# Altium PCB PCB5.PcbDoc
Units mil, origin at the board's own origin, x right, y up, seen from the top; angles counter-clockwise.
Board outline 3000 x 4000 mil, 2 copper layers (Top Layer, Bottom Layer); 32 components, 34 nets, 194 pads, 23 vias.
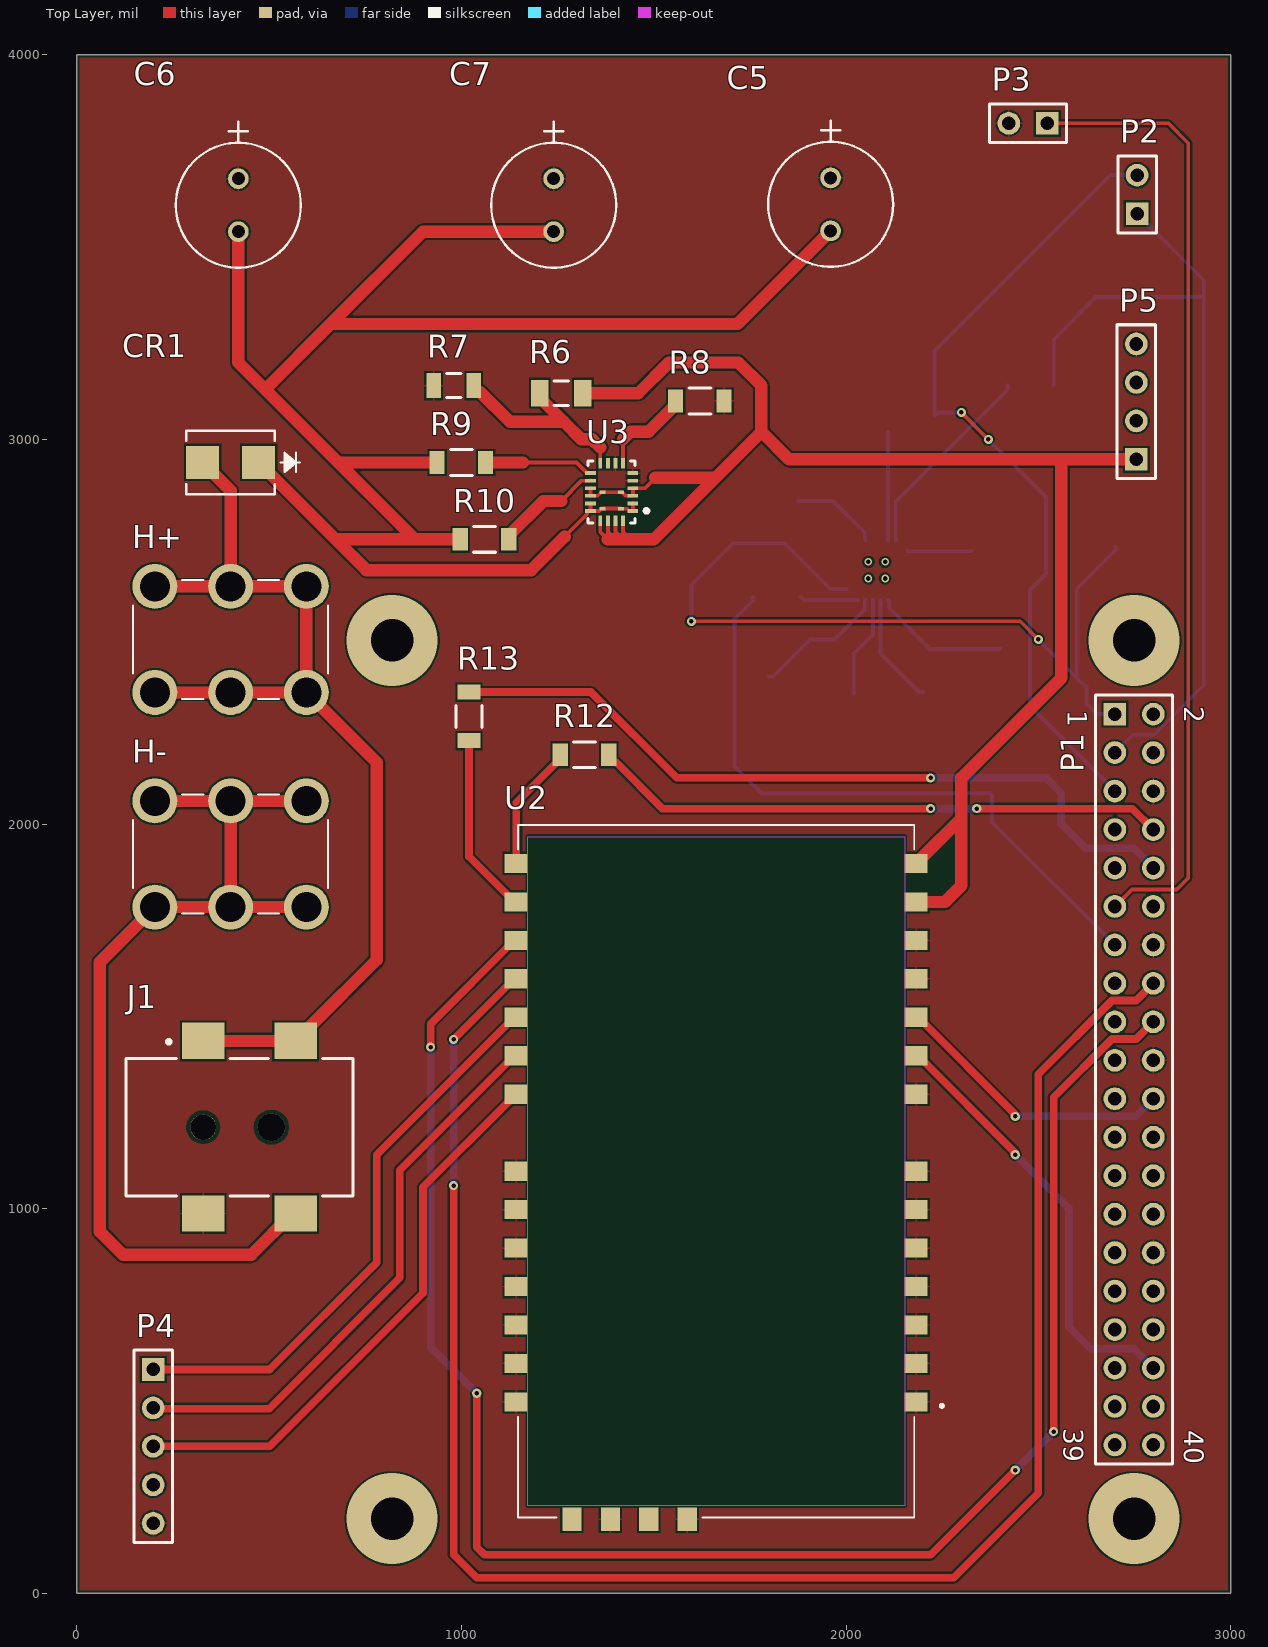
[diagram p0: Top Layer view]
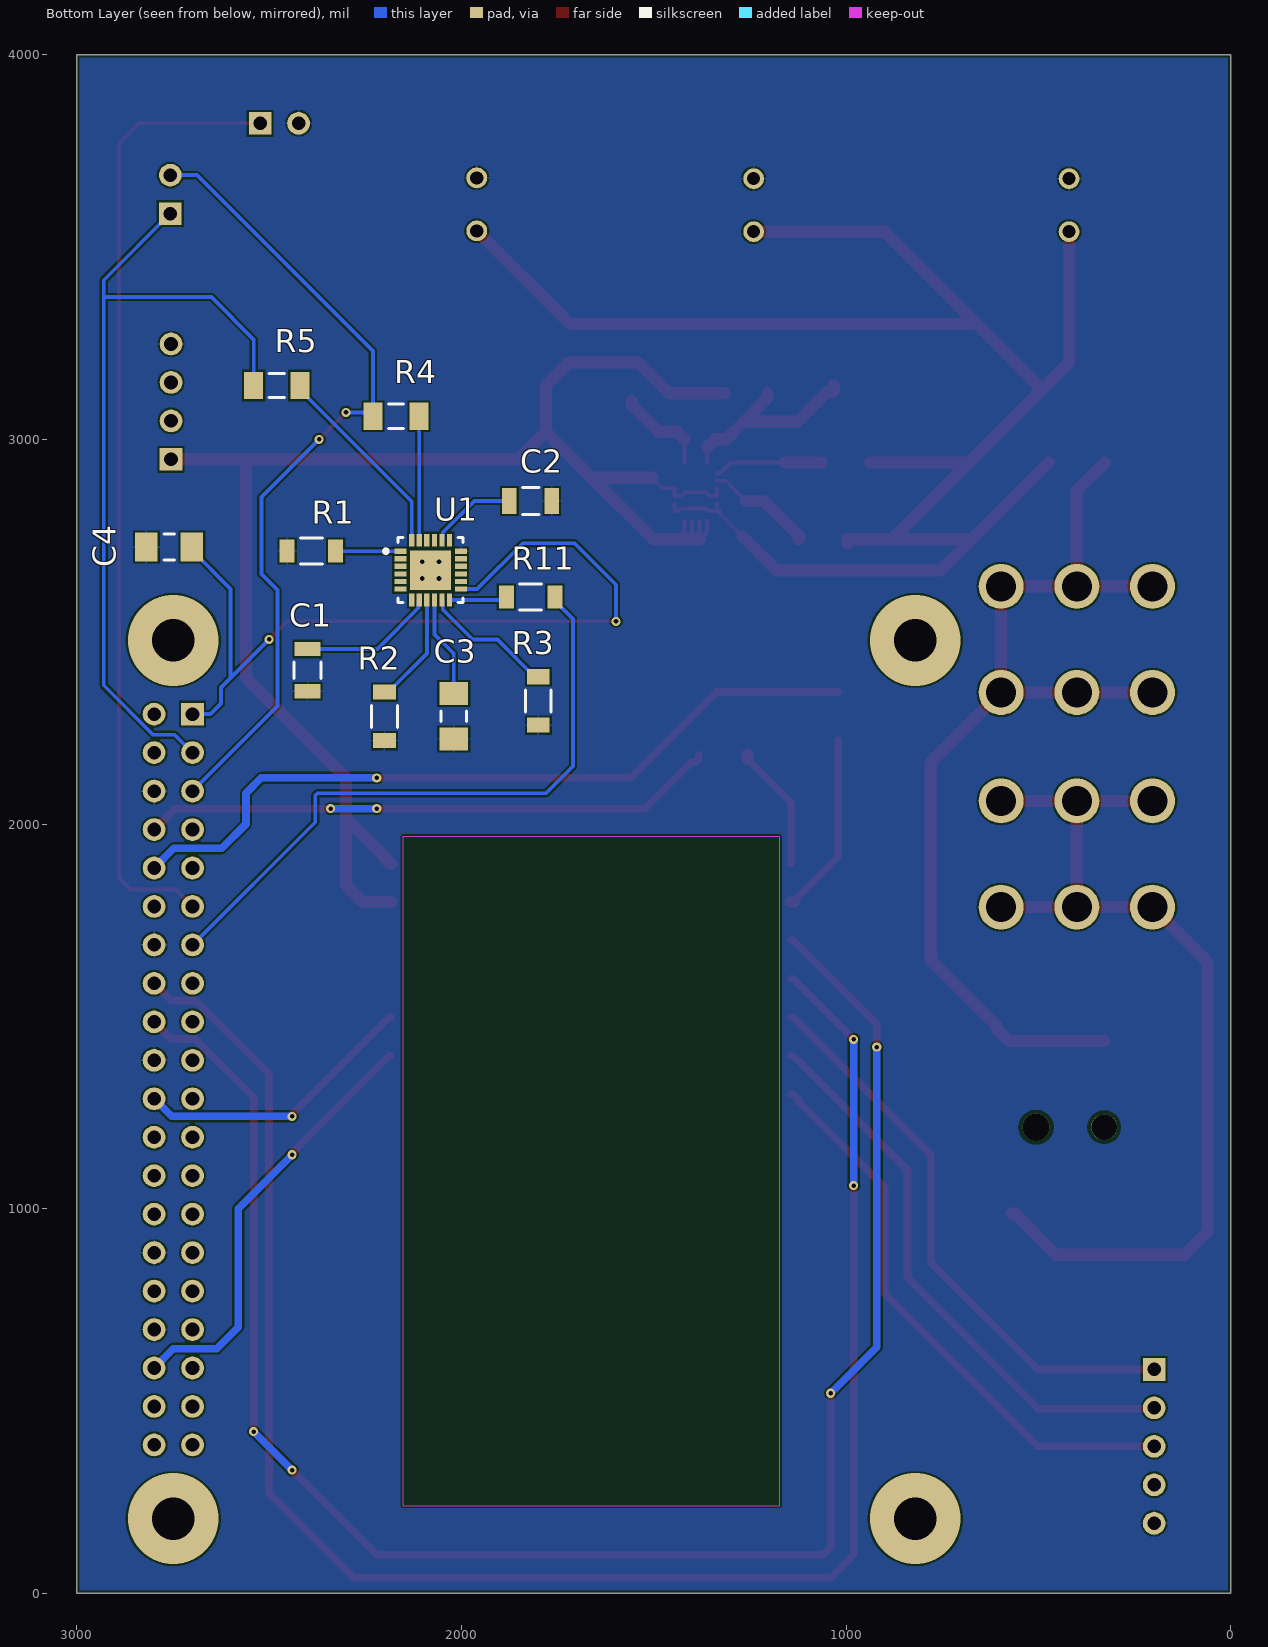
[diagram p1: Bottom Layer view, seen from below]
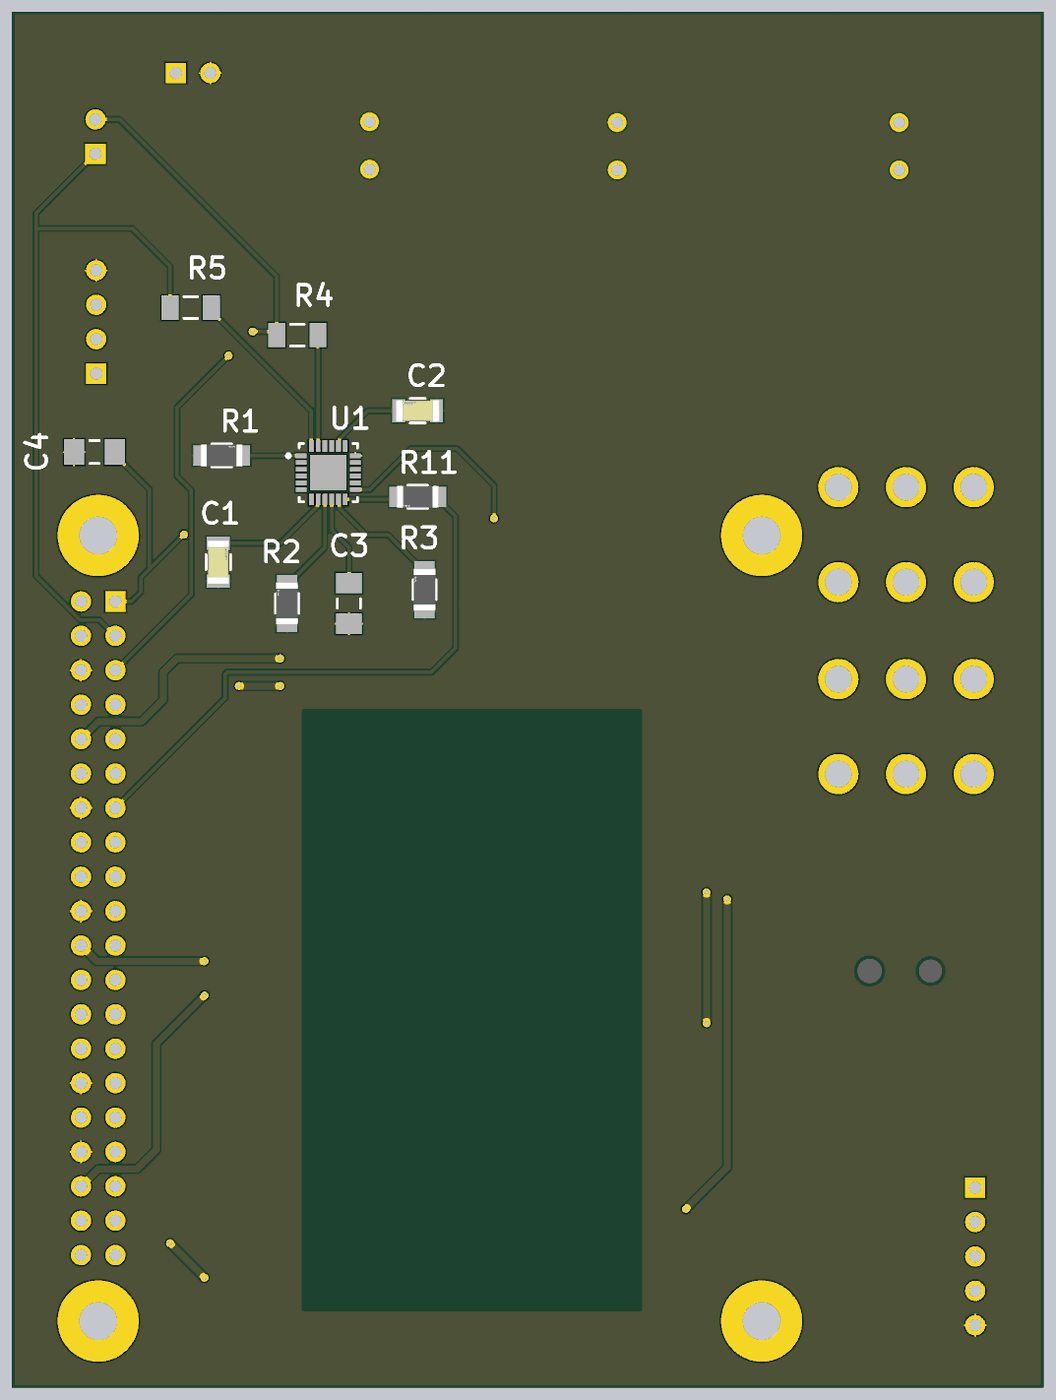
[diagram p2: 3D render of the assembled board from below, using the file's embedded part models]

## Layer stack, top to bottom
Top Solder: solder mask 0.4, Solder Resist, Dk 3.5
Top Layer: signal copper 1.4
Dielectric 1: dielectric 12.6, FR-4, Dk 4.8
Bottom Layer: signal copper 1.4
Bottom Solder: solder mask 0.4, Solder Resist, Dk 3.5

## Board outline
0,0 0,4000 3000,4000 3000,0

## Design rules (kind name [scope] priority, off if disabled: settings)
BoardOutlineClearance [All] p1: gap=7.87 ignorepadtopadclearanceinfootprint=FALSE
Clearance [All] p1: gap=5 ignorepadtopadclearanceinfootprint=FALSE except(9.84: Arc-Hole Track-Hole SMDPad-Hole THPad-Hole Via-Hole Fill-Hole Poly-Hole Region-Hole Text-Hole)
ComponentClearance [All] p1: gap=5 collisioncheckmode=3 verticalgap=5 showdistances=TRUE
DiffPairsRouting [All] p1: maxlimit=10 minlimit=5 mostfreqgap=5 toplayer_minwidth=5 toplayer_maxwidth=1000 toplayer_prefwidth=5 bottomlayer_minwidth=5 bottomlayer_maxwidth=1000 bottomlayer_prefwidth=5 maxuncoupledlength=500
Height [All] p1: minheight=0 maxheight=71497.94 prefheight=500
HoleSize [All] p1: absolutevalues=TRUE maxlimit=248.03 minlimit=11.81 maxpercent=80.000 minpercent=20.000
HoleToHoleClearance [All] p1: gap=9.84 allowstackedmicrovias=FALSE
MinimumAnnularRing [All] p1: minimumring=3
MinimumSolderMaskSliver [All] p1: minsoldermaskwidth=0
PlaneClearance [All] p1: clearance=5
PlaneConnect PlaneConnectPowerPads [InPadClass('PowerPads')] p1: planeconnectstyle=Direct reliefexpansion=20 reliefentries=4 reliefconductorwidth=10 reliefairgap=10
PlaneConnect [All] p2: pad.planeconnectstyle=Relief pad.reliefexpansion=11.81 pad.reliefentries=4 pad.reliefconductorwidth=5 pad.reliefairgap=5 via.planeconnectstyle=Direct via.reliefexpansion=11.81 via.reliefentries=4 via.reliefconductorwidth=5 via.reliefairgap=5
PolygonConnect PolygonConnectPowerPads [All vs (InPadClass('PowerPads'))] p1: connectstyle=Direct reliefconductorwidth=10 reliefentries=4 polygonreliefangle="90 Angle" airgapwidth=10
PolygonConnect [All] p2: thpad.connectstyle=Relief thpad.reliefconductorwidth=5 thpad.reliefentries=4 thpad.polygonreliefangle="90 Angle" thpad.airgapwidth=5 smdpad.connectstyle=Relief smdpad.reliefconductorwidth=5 smdpad.reliefentries=4 smdpad.polygonreliefangle="90 Angle" smdpad.airgapwidth=5 via.connectstyle=Direct via.reliefconductorwidth=5 via.reliefentries=4 via.polygonreliefangle="90 Angle" via.airgapwidth=5
RoutingVias [All] p1: holewidth=11.81 width=23.62 viastyle="Through Hole" minholewidth=11.81 minwidth=23.62 maxholewidth=23.62 maxwidth=259.84
SilkToSilkClearance [All] p1: silktosilkclearance=0
SilkToSolderMaskClearance [IsPad] p1: minsilkscreentomaskgap=5 clearancetoexposedcopper=TRUE
SolderMaskExpansion [All] p1: expansion=2.95 istentingtop=FALSE
Width [All] p1: maxlimit=1000 minlimit=10 preferedwidth=10 minimp=50.000000 maximp=50.000000 favimp=50.000000
20 further rules are at their usual default settings.

## Classes and differential pairs
differential pair M6EUSBData: +M6EUSBData_P -M6EUSBData_N

## Components (designator, comment, footprint, x,y, rotation, side; value= is the part's Value field where it differs from the comment)
C1 "C1206C103K1RACTU" FP-C1206C-EB-MFG 2400,2400 r270 bottom value="10,000 pF"
C2 "C1206C222K5RACTU" FP-C1206C-EB-MFG 1820,2840 r180 bottom value="2,200 pF"
C3 "C1206C104K5RACTU" KEMT-1206-2_M 2020,2280 r90 bottom
C4 "C1206C104K5RACTU" KEMT-1206-2_M 2760,2720 r180 bottom
C5 "UPJ1J560MPD1TD" CAP_UPJ_8X15_NCH 1960,3680 r270 top
C6 "UPJ1J560MPD1TD" CAP_UPJ_8X15_NCH 420,3677.8 r270 top
C7 "UPJ1J560MPD1TD" CAP_UPJ_8X15_NCH 1240,3677.8 r270 top
CR1 "SS2H10-E3/52T" DIODE_DO214AA 400,2940 r180 top
H+ "8197" KEYSTONE_8197 400,2480 r180 top
H- "8197" KEYSTONE_8197 400,1922.01 r180 top
J1 "PJ-002BH-SMT-TR" FP-PJ-002BH-SMT-TR-MFG 423.23,1211.61 r0 top
P1 "Header 20X2" HDR2X20 2699.02,2285.63 r270 top
P2 "Header 2" HDR1X2 2756.89,3587.01 r90 top
P3 "Header 2" HDR1X2 2523.23,3821.85 r180 top
P4 "Header 5" HDR1X5 198.82,581.89 r270 top
P5 "Header 4" HDR1X4 2754.92,2948.03 r90 top
R1 "RC1206JR-070RL" FP-RC1206-MFG 2390,2710 r180 bottom value=0Ω
R2 "RC1206JR-070RL" FP-RC1206-MFG 2200,2280 r90 bottom value=0Ω
R3 "RC1206JR-070RL" FP-RC1206-MFG 1800,2320 r90 bottom value=0Ω
R4 "RC1206FR-0710KL" RESC3116X65X40ML10T20 2170,3060 r180 bottom
R5 "RC1206FR-0710KL" RESC3116X65X40ML10T20 2480,3140 r180 bottom
R6 "CRCW120695K3FKEA" FP-CRCW1206-e3-IPC_B 1260,3120 r0 top
R7 "CRCW12063K92FKEA" FP-CRCW1206-e3-IPC_C 980,3140 r0 top
R8 "RC1206JR-070RL" FP-RC1206-MFG 1620,3100 r180 top value=0Ω
R9 "AC1206FR-07100KL" FP-AC1206-MFG 1000,2940 r180 top value=100KΩ
R10 "RC1206JR-070RL" FP-RC1206-MFG 1060,2740 r180 top value=0Ω
R11 "RC1206JR-070RL" FP-RC1206-MFG 1820,2590 r0 bottom value=0Ω
R12 "RC1206JR-070RL" FP-RC1206-MFG 1320,2180 r0 top value=0Ω
R13 "RC1206JR-070RL" FP-RC1206-MFG 1020,2280 r90 top value=0Ω
U1 "MPU-6050" IS-QFN-24_V 2080,2660 r180 bottom
U2 "M6E-MICRO" XCVR_M6E-MICRO 1662.4,1097.44 r180 top
U3 "LT3033IUDC#PBF" FP-UDC-20-05-08-1536-MFG 1390.75,2863.19 r180 top

## Footprints (in the part's own frame and the unit in brackets; to place one, negate y for a bottom-side part, rotate by r counter-clockwise, add the part's x,y. Pads: shape width x height; smd on the part's side, far side on the other; paste and mask are expansions set on the pad)
CAP_UPJ_8X15_NCH [mil]
  round 54 hole 34 mask+0: 1(0,0) 2(137.8,0)
  silkscreen extent -149,-162 231,162, body extent 0,0 10,10, height 10
DIODE_DO214AA [mil]
  rect 86x86 smd: 1(-73,0) 2(73,0)
  silkscreen extent -180,-83 115,83, body extent 0,0 10,10, height 10
FP-AC1206-MFG [mm]
  rect 1x1.5 smd paste+0 mask+0: 1(-1.6,0) 2(1.6,0)
  silkscreen extent -0.72,-0.85 0.72,0.85, body extent -2.2,-0.95 2.2,0.95, height 0.25
FP-C1206C-EB-MFG [mm]
  rect 0.95x1.7 smd paste+0 mask+0: 1(-1.4,0) 2(1.4,0)
  silkscreen extent -0.55,-0.9 0.55,0.9, body extent -1.6,-0.8 1.6,0.8, height 0.88
FP-CRCW1206-e3-IPC_B [mil]
  rect 45.51x69.22 smd paste+0 mask+0: 1(-56.14,0) 2(56.14,0)
  silkscreen extent -19,-31 19,31, body extent -89,-44 89,44, height 10
FP-CRCW1206-e3-IPC_C [mil]
  rect 37.64x65.28 smd paste+0 mask+0: 1(-52.21,0) 2(52.21,0)
  silkscreen extent -19,-31 19,31, body extent -75,-38 75,38, height 10
FP-PJ-002BH-SMT-TR-MFG [mm]
  rect 2.8x2.4 smd paste+0 mask+0: 1(-2.4,5.7) 1(3.7,5.7) 2(-2.4,-5.7) 3(3.7,-5.7)
  round 1.7 hole 1.7 unplated paste-1000 mask+0: ""(-2.4,0)
  round 1.8 hole 1.8 unplated paste-1000 mask+0: ""(2.1,0)
  silkscreen extent -7.5,-4.55 7.5,5.77, body extent -7.6,-7 7.6,7, height 0.25
FP-RC1206-MFG [mm]
  rect 1x1.5 smd paste+0 mask+0: 1(-1.6,0) 2(1.6,0)
  silkscreen extent -0.72,-0.85 0.72,0.85, body extent -1.55,-0.8 1.55,0.8, height 0.65
FP-UDC-20-05-08-1536-MFG [mm]
  rect 0.7x0.25 smd paste+0 mask+0: 1(-1.4,1.25) 2(-1.4,0.75) 3(-1.4,0.25) 4(-1.4,-0.25) 5(-1.4,-0.75) 6(-1.4,-1.25) 11(1.4,-1.25) 12(1.4,-0.75) 13(1.4,-0.25) 14(1.4,0.25) 15(1.4,0.75) 16(1.4,1.25)
  rect 0.25x0.7 smd paste+0 mask+0: 7(-0.75,-1.9) 8(-0.25,-1.9) 9(0.25,-1.9) 10(0.75,-1.9) 17(0.75,1.9) 18(0.25,1.9) 19(-0.25,1.9) 20(-0.75,1.9)
  rect 0.41x0.25 smd paste+0 mask+0: 21(-0.613,1.1) 22(0.612,1.1) 23(-0.613,0.019) 24(0.612,0.019)
  silkscreen extent -2.43,-2.05 1.55,2.05, body extent -1.85,-2.35 1.85,2.35, height 0.25
HDR1X2 [mm] "Connector; Header; 2 Position"
  rect 1.5x1.5 hole 0.9: 1(0,0)
  round 1.5 hole 0.9: 2(2.54,0)
  silkscreen extent -1.27,-1.27 3.81,1.27
HDR1X4 [mm] "Connector; Header; 4 Position"
  rect 1.5x1.5 hole 0.9: 1(0,0)
  round 1.5 hole 0.9: 2(2.54,0) 3(5.08,0) 4(7.62,0)
  silkscreen extent -1.27,-1.27 8.89,1.27
HDR1X5 [mm] "Connector; Header; 5 Position"
  rect 1.5x1.5 hole 0.9: 1(0,0)
  round 1.5 hole 0.9: 2(2.54,0) 3(5.08,0) 4(7.62,0) 5(10.16,0)
  silkscreen extent -1.27,-1.27 11.43,1.27
HDR2X20 [mm] "Connector; Header; 20x2 Position"
  rect 1.5x1.5 hole 0.9: 1(0,0)
  round 1.5 hole 0.9: 2(0,2.54) 3(2.54,0) 4(2.54,2.54) 5(5.08,0) 6(5.08,2.54) 7(7.62,0) 8(7.62,2.54) 9(10.16,0) 10(10.16,2.54) 11(12.7,0) 12(12.7,2.54) 13(15.24,0) 14(15.24,2.54) 15(17.78,0) 16(17.78,2.54) 17(20.32,0) 18(20.32,2.54) 19(22.86,0) 20(22.86,2.54) 21(25.4,0) 22(25.4,2.54) 23(27.94,0) 24(27.94,2.54) 25(30.48,0) 26(30.48,2.54) 27(33.02,0) 28(33.02,2.54) 29(35.56,0) 30(35.56,2.54) 31(38.1,0) 32(38.1,2.54) 33(40.64,0) 34(40.64,2.54) 35(43.18,0) 36(43.18,2.54) 37(45.72,0) 38(45.72,2.54) 39(48.26,0) 40(48.26,2.54)
  silkscreen extent -1.27,-1.27 49.53,3.81
IS-QFN-24_V [mm] "QFN, 24-Leads, Body 4x4mm, Pitch 0.5mm, Thermal Pad 2.7x2.6mm"
  rect 0.8x0.35 smd: 1(-2,1.25) 2(-2,0.75) 3(-2,0.25) 4(-2,-0.25) 5(-2,-0.75) 6(-2,-1.25) 13(2,-1.25) 14(2,-0.75) 15(2,-0.25) 16(2,0.25) 17(2,0.75) 18(2,1.25)
  rect 0.35x0.85 smd mask+0.102: 7(-1.25,-1.975) 8(-0.75,-1.975) 9(-0.25,-1.975) 10(0.25,-1.975) 11(0.75,-1.975) 12(1.25,-1.975) 19(1.25,1.975) 20(0.75,1.975) 21(0.25,1.975) 22(-0.25,1.975) 23(-0.75,1.975) 24(-1.25,1.975)
  rect 2.7x2.6 smd: 25(0,0)
  silkscreen extent -3.08,-2.15 2.15,2.15, body extent -2,-2 2,2, height 0.95
KEMT-1206-2_M [mm] "SMD, 2-Leads, Body 3.4x1.8mm, IPC Low Density"
  rect 1.5x1.9 smd: 1(-1.5,0) 2(1.5,0)
  silkscreen extent -0.35,-0.85 0.35,0.85, body extent -1.7,-0.9 1.7,0.9, height 0.88
KEYSTONE_8197 [mm]
  round 2.97 hole 1.98: 1(-5,-3.505) 2(-5,3.505) 3(0,-3.505) 4(0,3.505) 5(5,-3.505) 6(5,3.505)
  silkscreen extent -6.44,-3.94 6.44,3.94
RESC3116X65X40ML10T20 [mm] "Chip Resistor, 2-Leads, Body 3.10x1.60mm, IPC Low Density"
  rect 1.25x1.8 smd: 1(-1.525,0) 2(1.525,0)
  silkscreen extent -0.5,-0.8 0.5,0.8, body extent -1.6,-0.85 1.6,0.85, height 0.65
XCVR_M6E-MICRO [mil]
  rect 60x50 smd: 1(-520,600) 2(520,600) 3(-520,500) 4(520,500) 5(-520,400) 6(520,400) 7(-520,300) 8(520,300) 9(-520,200) 10(520,200) 11(-520,100) 12(520,100) 13(-520,0) 14(520,0) 15(-520,-200) 16(520,-200) 17(-520,-300) 18(520,-300) 19(-520,-400) 20(520,-400) 21(-520,-500) 22(520,-500) 23(-520,-600) 24(520,-600) 25(-520,-700) 26(520,-700) 27(-520,-800) 28(520,-800)
  rect 50x60 smd: 29(75,905) 30(175,905) 31(275,905) 32(375,905)
  Keep-Out Layer region: 490,-870 -490,-870 -490,870 490,870
  Keep-Out Layer region: 490,-870 -490,-870 -490,870 490,870
  silkscreen extent -591,-900 515,900

## Part data
C1: library part CMP-03020-021723-1, "Cap Ceramic 0.01uF 100V X7R 10% SMD 1206 125°C Plastic T/R", Capacitance="10,000 pF", Manufacturer=KEMET, Package=C1206C-EB, Temperature="-55°C to +150°C", Temperature Characteristic=X7R, Temperature Coefficient=15%, Temperature Range High=+150°C, Temperature Range Low=-55°C, Tolerance=0.1, Voltage Rating="100 V", Automotive=Yes, Automotive Grade="Grade 0", Category=Cap, ComponentLink2Description=Datasheet, ComponentLink2URL=https://content.kemet.com/datasheets/KEM_C1007_X8R_ULTRA_150C_SMD.pdf, Device Class L1="Passive Components", Device Class L2=Capacitors, Device Class L3="Ceramic Capacitors", Digikey Description="Cap Ceramic 0.01uF 100V X7R 10% SMD 1206 125°C Plastic T/R", Height=0.88mm, Ipc Land Pattern Name=CAPC320160X78, Lead Free=Yes, Manufacturer Part Number=C1206C103K1RACTU, Material=Ceramic, Mouser Description="Multilayer Ceramic Capacitors MLCC - SMD/SMT 100volts 10000pF X7R 10%", Octopart=https://octopart.com/c1206c103k1ractu-kemet-117927, RoHS=TRUE
C2: library part CMP-03020-006263-1, "CAP CER 2200PF 50V X7R 1206", Capacitance="2,200 pF", Manufacturer=KEMET, Package=C1206C-EB, Temperature="-55°C to +150°C", Temperature Characteristic=X7R, Temperature Coefficient=15%, Temperature Range High=+150°C, Temperature Range Low=-55°C, Tolerance=0.1, Voltage Rating="50 V", Automotive=Yes, Automotive Grade="Grade 0", Category=Cap, ComponentLink2Description=Datasheet, ComponentLink2URL=https://content.kemet.com/datasheets/KEM_C1007_X8R_ULTRA_150C_SMD.pdf, Device Class L1="Passive Components", Device Class L2=Capacitors, Device Class L3="Ceramic Capacitors", Digikey Description="CAP CER 2200PF 50V X7R 1206", Height=0.88mm, Ipc Land Pattern Name=CAPC320160X78, Lead Free=Yes, Manufacturer Part Number=C1206C222K5RACTU, Material=Ceramic, Mouser Description="Multilayer Ceramic Capacitors MLCC - SMD/SMT 50volts 2200pF X7R 10%", Octopart=https://octopart.com/c1206c222k5ractu-kemet-135692, RoHS=TRUE
C3 C4: library part CMP-1037-04202-2, "CAP, Ceramic, 0.1 uF, +/- 10%, 50 V, -55 to 125 degC, 1206 (3216 Metric), RoHS, Tape and Reel", Capacitance=0.1µF, Capacitance Tolerance=±10%, Capacitor Case Style=1206[3216Metric], Dielectric Characteristic=X7R, Manufacturer=Kemet, Operating Temperature Max=125degC, Operating Temperature Min=-55degC, Package Description="2-Leads SMD, Body 3.2 x 1.6 mm", Package Reference=1206-2, Voltage Rating=50V, Datasheet URL=https://datasheet.ciiva.com/6125/1725438-6125494.pdf, Datasheet Version=Jul-13, Manufacturer URL=http://www.kemet.com/, Packaging=Tape&Reel, Product Range=KEMET-CSeries, SVHC=ToBeAdvised
C5 C6 C7 CR1: "No Description Available", Copyright="Copyright (C) 2018 Accelerated Designs. All rights reserved", RefDes=RefDes, Type=DEV
  C5 C6 C7: Built_By=EMA_Cory, Manufacturer_Part_Number=UPJ1J560MPD1TD, SourceLibrary=Nichicon_2019-09-13, Vendor=Nichicon
  CR1: Built_By=EMA_UL_Team, Manufacturer_Part_Number=SS2H10-E3/52T, Vendor=Vishay
H+ H-: "Magnet Neodymium Iron Boron _NdFeB_ 0.500 Dia x 0.750 H _12.7mm x 19.0mm_", Package=None, Availability=Unavailable, MF="Radial Magnet", MP=8197, Price=None, SnapEDA_Link=https://www.snapeda.com/parts/8197/Keystone%20Electronics/view-part/474380/?ref=snap
J1: library part CMP-2000-06897-2, "CONN PWR JACK 2.5X5.5MM SOLDER", Current Rating=5A, Manufacturer="CUI Inc", Package=0, Temperature="-25°C to +85°C", Temperature Range High=+85°C, Temperature Range Low=-25°C, Voltage Rating=24V, Automotive=No, Category=Conn, ComponentLink2Description=Datasheet, ComponentLink2URL=https://www.cuidevices.com/product/resource/digikeypdf/pj-002bh-smt-tr.pdf, Conn Gender=Male, Conn Orientation="Right Angle", Contact Material=Nickel,Silver, Device Class L1=Connectors, Device Class L2="Power Connectors", Device Class L3=unset, Digikey Description="CONN PWR JACK 2.5X5.5MM SOLDER", Height=11.43mm, Lead Free=Yes, Manufacturer Part Number=PJ-002BH-SMT-TR, Mouser Description="2.5 mm Center Pin, 5.0 A, Right Angle, Surface Mount (SMT), Dc Power Jack Connector", Number Of Contacts=3, Octopart=https://octopart.com/pj-002bh-smt-tr-cui-25947151, RoHS=TRUE, Standoff Height=0.1mm
P1: "Header, 20-Pin, Dual row", LatestRevisionDate=17-Jul-2002, LatestRevisionNote="Re-released for DXP Platform.", Publisher="Altium Limited"
P2 P3: "Header, 2-Pin", LatestRevisionDate=17-Jul-2002, LatestRevisionNote="Re-released for DXP Platform.", Publisher="Altium Limited"
P4: "Header, 5-Pin", LatestRevisionDate=17-Jul-2002, LatestRevisionNote="Re-released for DXP Platform.", Publisher="Altium Limited"
P5: "Header, 4-Pin", LatestRevisionDate=17-Jul-2002, LatestRevisionNote="Re-released for DXP Platform.", Publisher="Altium Limited"
R1 R2 R3 R8 R10 R11 R12 R13: library part CMP-2100-03681-2, "RES SMD 0 OHM JUMPER 1/4W 1206", Manufacturer=YAGEO, Package=RC1206, Power Rating=0.25W, Resistance=0Ω, Temperature="-55°C to +155°C", Temperature Coefficient=300ppm/°C, Temperature Range High=+155°C, Temperature Range Low=-55°C, Tolerance=5%, Voltage Rating=200V, Automotive=No, Category=Res, ComponentLink2Description=Datasheet, ComponentLink2URL=https://www.yageo.com/upload/media/product/productsearch/datasheet/rchip/PYu-RC_Group_51_RoHS_L_10.pdf, Composition="Thick Film", Device Class L1="Passive Components", Device Class L2=Resistors, Device Class L3="Chip SMD Resistors", Digikey Description="RES SMD 0 OHM JUMPER 1/4W 1206", Footprint Url=https://www.yageo.com/upload/website/yageo_PYu-R_Mount_10_19050818_343.pdf, Height=0.65mm, Ipc Land Pattern Name=RESC310160X55, Lead Free=Yes, Manufacturer Part Number=RC1206JR-070RL, Mouser Description="Resistor: thick film; SMD; 1206; 0O; 0.25W; ±5%; -55÷155°C", Octopart=https://octopart.com/rc1206jr-070rl-yageo-40025601, RoHS=TRUE, Series=RC
R4 R5: library part CMP-1014-00623-2, "Chip Resistor, 10 KOhm, +/- 1%, 0.25 W, -55 to 155 degC, 1206 (3216 Metric), RoHS, Tape and Reel", Case Code (Imperial)=1206, Case Code (Metric)=3216, Manufacturer=Yageo, Max Operating Temperature=155degC, Min Operating Temperature=-55degC, Package Description="2-Pin Surface Mount Device, Body 3.1 x 1.6 mm", Package Quantity=5000, Package Reference=1206.0, Power Rating=250mW, Resistance=10KΩ, Temperature Coefficient=100ppm/degreesC, Tolerance=1%, Voltage Rating=200V, Case/Package=1206, Composition=ThickFilm, Datasheet URL=http://www.yageo.com/NewPortal/yageodocoutput?fileName=/pdf/R-Chip/PYu-RC_Group_51_RoHS_L_5.pdf, Datasheet Version="Rev. 5, 10/2016", Depth=1.6mm, Height=0.55mm, Lead Free=LeadFree, Length=3.1mm, Manufacturer URL=http://www.yageo.com/, Military Standard=Not, Packaging=TapeandReel, REACH SVHC=Unknown, RoHSCompliant=true, Termination=SMD/SMT, Width=1.6mm
R6: library part CMP-02407-004492-1, "RES Thick Film, 95.3kΩ, 1%, 0.25W, 100ppm/°C, 1206", Case Code (Imperial)=1206, Case Code (Metric)=3216, Max Operating Temperature=155°C, Max Power Dissipation=250mW, Min Operating Temperature=-55°C, Package Quantity=10, Resistance=95.3kΩ, Temperature Coefficient=100ppm/°C, Tolerance=1%, Voltage Rating=200V, Case/Package=1206, Composition="Thick Film", Contact Plating=Tin, Depth=1.6mm, Features="Automotive AEC-Q200", Height=0.024inch, Lead Free="Lead Free", Length=3.2mm, Military Standard=Not, Number of Pins=2, Number of Terminations=2, Packaging="Tape and Reel", Power Rating=250mW, Radiation Hardening=No, Voltage Rating (DC)=200V, Weight=0.000353oz, Width=0.063inch
R7: library part CMP-2003-02162-2, "RES Thick Film, 3.92kΩ, 1%, 0.25W, 100ppm/°C, 1206", Case Code (Imperial)=1206, Case Code (Metric)=3216, Max Operating Temperature=155°C, Max Power Dissipation=250mW, Min Operating Temperature=-55°C, Package Quantity=10, Resistance=3.92kΩ, Temperature Coefficient=100ppm/°C, Tolerance=1%, Voltage Rating=200V, Case/Package=1206, Composition="Thick Film", Contact Plating=Tin, Depth=1.6mm, Features="Automotive AEC-Q200", Height=0.55mm, Lead Free="Lead Free", Length=3.2mm, Military Standard=Not, Number of Pins=2, Number of Terminations=2, Packaging="Tape and Reel", Power Rating=250mW, Radiation Hardening=No, Termination=SMD/SMT, Voltage Rating (DC)=200V, Weight=0.000353oz, Width=1.6mm
R9: library part CMP-2003-04909-2, "RES SMD 100K OHM 1% 1/4W 1206", Manufacturer=Yageo, Package=AC1206, Power Rating=0.25W, Resistance=100KΩ, Temperature="-55°C to +155°C", Temperature Range High=+155°C, Temperature Range Low=-55°C, Tolerance=0.01, Voltage Rating=200V, Automotive=Yes, Automotive Grade="Grade 0", Category=Res, ComponentLink2Description=Datasheet, ComponentLink2URL=http://www.yageo.com/NewPortal/yageodocoutput?fileName=/pdf/R-Chip/PYu-AC_51_RoHS_L_6.pdf, Composition="Thick Film", Device Class L1="Passive Components", Device Class L2=Resistors, Device Class L3="Chip SMD Resistors", Digikey Description="RES SMD 100K OHM 1% 1/4W 1206", Footprint Url=http://www.yageo.com/exep/pages/download/literatures/PYu-R_Mount_10.pdf, Height=0.65mm, Ipc Land Pattern Name=RESC310160X55, Lead Free=Yes, Manufacturer Part Number=AC1206FR-07100KL, Mouser Description="RES SMD 100K OHM 1% 1/4W 1206", Octopart=https://octopart.com/ac1206fr-07100kl-yageo-21711116, RoHS=TRUE, Series=AC
U1: library part CMP-1753-00002-2, "3-Axis Gyroscope, Accelerometer and a Digital Motion Processor(TM) (DMP), 2.375 to 3.46 V, -40 to 85 degC, 24-Pin QFN, RoHS, Tape and Reel", Manufacturer=InvenSense, Standard Package=5,000, Category=Sensors,Transducers, Datasheet URL=http://datasheet.octopart.com/MPU-6050-InvenSense-datasheet-14421344.pdf, Datasheet Version="Rev. 3.3, 05/2012", Dynamic Catalog=MPU-6000™Series, Family=Multifunction, Featured Product=MPU-60506-Axis,IntegratedI²CSolution, Manufacturer URL=http://www.invensense.com/, Online Catalog=MPU-6000™Series, Other Names="1428-1007-2 / MPU6050", Output Type=Digital, Sensor Type=MotionTracking, Unit PriceUSD=Digital
U2: "KIT DEVELOPMENT M6E MICRO-LTE", Package="Module Thingmagic", Availability=Warning, Check_prices=https://www.snapeda.com/parts/M6E-MICRO/ThingMagic,%20a%20JADAK%20brand/view-part/791113/?ref=eda, DigiKey-Purchase-URL=https://snapeda.com/shop?store=DigiKey&id=791113, MF="ThingMagic, a", MP=M6E-MICRO, Price=None, SnapEDA_Link=https://www.snapeda.com/parts/M6E-MICRO/ThingMagic,%20a%20JADAK%20brand/view-part/791113/?ref=snap
U3: library part CMP-09138-000006-1, "IC REG LINEAR POS ADJ 3A 20QFN", Dropout Voltage=95mV, Manufacturer="Analog Devices", Max Junction Temp=+125°C, Max Supply Voltage=10V, Min Supply Voltage=0.95V, Nominal Supply Current=1.9-27mA, Output Current=3A, Output Voltage=0.2-9.7V, Package=UDC-20-05-08-1536, Temperature="-40°C to +125°C", Temperature Range Low=-40°C, Automotive=No, Category=IC, ComponentLink2Description=Datasheet, ComponentLink2URL=https://www.analog.com/media/en/technical-documentation/data-sheets/LT3033.pdf, Device Class L1="Integrated Circuits (ICs)", Device Class L2="Power Management ICs", Device Class L3="Voltage Regulators - Linear", Digikey Description="IC REG LINEAR POS ADJ 3A 20QFN", Height=0.8mm, Lead Free=Yes, Manufacturer Part Number=LT3033IUDC#PBF, Number Of Outputs=1, Octopart=https://octopart.com/lt3033iudc%23pbf-analog+devices-95403585, Output Type=AdjustableProgrammable, RoHS=TRUE, Standoff Height=0mm, Temperature Range High=+125°C

## Via types
v1: diameter 23.62, hole 11.81, Top Layer to Bottom Layer, 15 vias
v2: diameter 236.22, hole 110.24, Top Layer to Bottom Layer, 4 vias
v3: diameter 19.68, hole 12, Top Layer to Bottom Layer, 4 vias

## Nets (pads, with @x,y where several pads share a name; then routed paths per layer and width w, separated by ;. In a path a pad name is that pad's centre, name@x,y a point inside that pad or via, vN(x,y) a via of type N, cw(c..) or ccw(c..) an arc to the next point about the centre after c; other vN are vias at no path point)
"3V3 From Pi": C4.2 P1.1 U1.13 | length 2199.9
  Top Layer w10: v1(1598,2527) 2453,2527 v1(2500,2480)
  Bottom Layer w10: v1(1598,2527) 1598,2622.14 1705.86,2730 1840,2730 1959.21,2610.79 U1.13 ; v1(2500,2480) 2600,2380 ; P1.1 2652.37,2285.63 2625,2313 2625,2355 2600,2380 ; C4.2 2700.94,2712.13 2600,2611.18 2600,2380
"5v Vin (3.5-5.25VDC)": P5.1 R6.2 U2.25 U2.27 U3.3 U3.4 U3.13 U3.14 U3.17 U3.18 U3.19 U3.20 U3.23 U3.24 | length 4290.6
  Top Layer w10: U3.13 U3.14 1354.55,2853.35 1363.64,2862.44 U3.24 U3.23 1417.85,2862.44 1426.95,2853.35 U3.3 U3.4 1477.03,2873.03 1504,2900 ; U3.17 1361.22,2758.78 1380,2740 ; U3.18 1380.91,2759.09 1400,2740 ; U3.19 1400.59,2759.41 1420,2740 ; U3.20 1420.28,2759.72 1440,2740
  Top Layer w32: R6.2 1460,3120 1540,3200 1720,3200 1780,3140 1780,3020 ; 1380,2740 1400,2740 1420,2740 1440,2740 1500,2740 1660,2900 ; 1504,2900 1660,2900 ; U2.25 2257.44,1797.44 2300,1840 2300,2015.04 ; U2.27 2187.4,1897.44 2196.4,1906.44 2196.4,1911.44 2300,2015.04 ; P5.1 2560,2948.03 ; 1660,2900 1780,3020 ; 1780,3020 1851.97,2948.03 2560,2948.03 ; 2300,2015.04 2300,2120 2560,2380 2560,2948.03
GND: C1.2 C2.2 C3.1 C4.1 C5.1 C6.1 C7.1 J1.2 P1.6 P1.14 P1.20 P1.30 P1.34 P3.2 P4.5 P5.4 R1.1 R2.1 R3.1 R7.1 R8.1 U1.18 U2.1 U2.2 U2.3 U2.4 U2.5 U2.6 U2.7 U2.8 U2.9 U2.10 U2.11 U2.12 U2.13 U2.14 U2.15 U2.21 U2.23 U2.29 U2.31 U3.5 U3.6 U3.8
M6EUSBData_N: P4.2 U2.18 | length 1488.4
  Top Layer w20: P4.2 200.71,480 500,480 840,820 840,1100.04 1137.4,1397.44 U2.18
M6EUSBData_P: P4.3 U2.16 | length 1486.9
  Top Layer w20: P4.3 501.89,381.89 900,780 900,1055.04 1122.4,1277.44 1122.4,1282.44 1137.4,1297.44 U2.16
NetC1_1: C1.1 U1.8 | length 353.7
  Bottom Layer w10: U1.8 2111.42,2580.35 2111.42,2562.28 2218.57,2455.12 C1.1
NetC2_1: C2.1 U1.20 | length 228.3
  Bottom Layer w10: C2.1 1966.31,2840 2048.58,2757.73 2048.58,2739.65 U1.20
NetC3_2: C3.2 U1.10 | length 264
  Bottom Layer w10: C3.2 2020,2442.91 2070.16,2493.07 U1.10
NetC5_2: C5.2 C6.2 C7.2 CR1.1 R9.2 R10.2 U3.1 U3.2 U3.15 U3.16 U3.21 U3.22 | length 5101.5
  Top Layer w10: 1268.44,2746.79 1326.85,2805.2 1326.85,2813.9 1326.93,2813.98 U3.16 ; U3.15 U3.16 ; U3.2 U3.1 1437.17,2813.98 1431.34,2819.8 1414.94,2819.8 U3.21 U3.22 1363.64,2819.88 1357.81,2814.06 1335.71,2814.06 U3.16
  Top Layer w32: C6.2 420,3200 490,3130 ; CR1.1 676.5,2736.5 ; R9.2 680,2940 ; R10.2@997.01,2730.16 R10.2 880,2740 ; C7.2 900,3540 660,3300 ; 1268.44,2746.79 1181.65,2660 753,2660 676.5,2736.5 ; C5.2 1717.8,3300 660,3300 ; 490,3130 680,2940 ; 490,3130 660,3300 ; 676.5,2736.5 680,2740 880,2740 ; 680,2940 880,2740
NetCR1_2: CR1.2 H+.1 H+.2 H+.3 H+.4 H+.5 H+.6 J1.1 | length 2730.4
  Top Layer w32: H+.6 H+.4 H+.2 ; H+.5 H+.3 ; CR1.2 400,2867 H+.3 ; J1.1@328.74,1436.02 568.9,1436.02 576.77,1436.02 608.02,1467.27 608.02,1475.14 780,1647.13 780,2160 597.99,2342.01 H+.2 ; H+.3 H+.1 H+.2
NetH-_1: H-.1 H-.2 H-.3 H-.4 H-.5 H-.6 J1.3 | length 2544.9
  Top Layer w32: H-.5 H-.3 ; J1.3 561.02,987.2 453.82,880 120,880 60,940 60,1640.87 H-.6 H-.4 ; H-.2 H-.4 ; H-.1 H-.3 ; H-.4 H-.3
NetP1_3: P1.3 P2.1 R5.1 | length 2157.1
  Bottom Layer w10: R5.1 2540.04,3260.04 2650,3370 2930,3370 ; P1.3 2745.52,2232.14 2801.42,2232.14 2930,2360.71 2930,3370 ; P2.1 2930,3413.9 2930,3370
NetP1_5: P1.5 P2.2 R4.1 | length 2144.6
  Top Layer w10: v1(2300,3070) v1(2370,3000)
  Bottom Layer w10: v1(2300,3070) 2240.04,3070 R4.1 2230.04,3230.04 2687.01,3687.01 P2.2 ; v1(2370,3000) 2520,2850 2520,2650 2478.19,2608.19 2478.19,2306.46 P1.5
NetP1_8: P1.8 R12.2 | length 1502.3
  Top Layer w20: R12.2 1382.99,2170.16 1392.68,2160.47 1402.52,2160.47 1522.99,2040 v1(2220,2040) ; v1(2340,2040) 2744.65,2040 P1.8
  Bottom Layer w20: v1(2220,2040) v1(2340,2040)
NetP1_10: P1.10 R13.2 | length 2015.3
  Top Layer w20: R13.2 1337.01,2342.99 1560,2120 v1(2220,2120)
  Bottom Layer w20: v1(2220,2120) 2520,2120 2560,2080 2560,2000 2623,1937 2747.65,1937 P1.10
NetP1_11: P1.11 P3.1 | length 2520
  Top Layer w10: P3.1 2838.15,3821.85 2890,3770 2890,1860 2860,1830 2743.39,1830 P1.11
NetP1_13: P1.13 R11.1 | length 1681.5
  Bottom Layer w10: R11.1 1757.01,2580.16 1710,2533.15 1710,2150 1780,2080 2374.14,2080 2380,2074.14 2380,2004.65 P1.13
NetP1_16: P1.16 U2.22 | length 4690
  Top Layer w20: v1(980,1060) 980,100 1040,40 2280,40 2500,260 2500,1349.59 2691.52,1541.1 2754.49,1541.1 P1.16 ; v1(980,1440) 1137.4,1597.44 U2.22
  Bottom Layer w20: v1(980,1060) v1(980,1440)
NetP1_18: P1.18 U2.24 | length 4572.8
  Top Layer w20: v1(920,1420) 920,1480.04 1137.4,1697.44 U2.24 ; v1(1040,520) 1040,120 1060,100 2220,100 v1(2440,320) ; v1(2540,420) 2540,1289.59 2691.52,1441.1 2754.49,1441.1 P1.18
  Bottom Layer w20: v1(920,1420) 920,640 v1(1040,520) ; v1(2440,320) v1(2540,420)
NetP1_22: P1.22 U2.19 | length 745
  Top Layer w20: U2.19 2187.4,1497.44 2439.31,1245.54 2439.31,1240.69 v1(2440,1240)
  Bottom Layer w20: v1(2440,1240) 2753.39,1240 P1.22
NetP1_36: P1.36 U2.17 | length 1136.1
  Top Layer w20: U2.17 2187.4,1397.44 2439.31,1145.54 2439.31,1140.69 v1(2440,1140)
  Bottom Layer w20: v1(2440,1140) 2580,1000 2580,692 2636,636 2748.65,636 P1.36
NetP4_1: P4.1 U2.20 | length 1486.9
  Top Layer w20: P4.1 501.89,581.89 780,860 780,1140.04 1137.4,1497.44 U2.20
NetR1_2: R1.2 U1.1 | length 168.6
  Bottom Layer w10: U1.1 2326.22,2709.21 R1.2
NetR2_2: R2.2 U1.9 | length 290.6
  Bottom Layer w10: U1.9 2089.84,2443.31 2190.16,2342.99 R2.2
NetR3_2: R3.2 U1.11 | length 346.3
  Bottom Layer w10: R3.2 1809.84,2382.99 1906.37,2479.52 1970.37,2479.52 2048.58,2557.74 2048.58,2580.35 U1.11
NetR4_2: R4.2 U1.23 | length 282.4
  Bottom Layer w10: U1.23 2109.53,3019.57 2109.96,3020
NetR5_2: R5.2 U1.24 | length 522.7
  Bottom Layer w10: U1.24 2129.21,2838.43 2419.96,3129.17 R5.2
NetR6_1: R6.1 R7.2 U3.10 | length 544.4
  Top Layer w10: U3.10 1361.22,2978.78
  Top Layer w32: R7.2 1032.21,3126.18 1035.03,3123.36 1048.85,3123.36 1126.21,3046 1266,3046 ; R6.1 1203.85,3108.15 1266,3046 ; 1361.22,2978.78 1340,3000 1312,3000 1266,3046
NetR8_2: R8.2 U3.7 | length 246.1
  Top Layer w10: U3.7 1420.28,3000.28
  Top Layer w32: 1420.28,3000.28 1440,3020 1486.85,3020 1557.01,3090.16 R8.2
NetR9_1: R9.1 U3.11 | length 284.1
  Top Layer w10: 1160,2940 1299.33,2940 1326.93,2912.4 U3.11
  Top Layer w32: R9.1 1160,2940
NetR10_1: R10.1 U3.12 | length 281.7
  Top Layer w10: 1260,2840 1312.64,2892.64 1335.55,2892.64 U3.12
  Top Layer w32: R10.1 1122.99,2749.84 1213.15,2840 1260,2840
NetR11_2: R11.2 U1.12 | length 151
  Bottom Layer w10: R11.2 1890.75,2582.24 U1.12
NetR12_1: R12.1 U2.28 | length 330
  Top Layer w20: U2.28 1142.4,2055.55 R12.1@1257.01,2170.16
  Top Layer w32: R12.1@1257.01,2170.16 R12.1
NetR13_1: R13.1 U2.26 | length 473.2
  Top Layer w20: R13.1 1020,1914.84 U2.26@1137.4,1797.44
  Top Layer w32: U2.26@1137.4,1797.44 U2.26
pads on no net: J1. P1.2 P1.4 P1.7 P1.9 P1.12 P1.15 P1.17 P1.19 P1.21 P1.23 P1.24 P1.25 P1.26 P1.27 P1.28 P1.29 P1.31 P1.32 P1.33 P1.35 P1.37 P1.38 P1.39 P1.40 P4.4 P5.2 P5.3 U1.2 U1.3 U1.4 U1.5 U1.6 U1.7 U1.14 U1.15 U1.16 U1.17 U1.19 U1.21 U1.22 U1.25 U2.30 U2.32 U3.9
copper on no net:
  other v2: 819.88,193.9 2749.02,193.9 819.88,2477.36 2749.02,2477.36
  other v3: 2058.35,2638.35 2101.65,2638.35 2058.35,2681.65 2101.65,2681.65

## Polygon pours and split planes (outlines as drawn)
GND on Top Layer "GND_L01_P000" (solid, remove dead copper, pour order 0): 0,0 0,4000 3000,4000 3000,0
GND on Bottom Layer "GND_L02_P001" (solid, remove dead copper, pour order 1): 0,0 0,4000 3000,4000 3000,0

## Silkscreen, mask and mechanical layers (free items; w line width, h text height)
Mechanical 1:
  the board outline again, w10

## Text inside footprints (layer, text, board x,y; h text height)
C5: Mechanical 7 "0.315in/8.001mm" at 2187.5,3704.85 h25 r270; Mechanical 7 "0.138in/3.5mm" at 1707.5,3692.35 h25 r270
C6: Mechanical 7 "0.315in/8.001mm" at 647.5,3702.65 h25 r270; Mechanical 7 "0.138in/3.5mm" at 167.5,3690.15 h25 r270
C7: Mechanical 7 "0.315in/8.001mm" at 1467.5,3702.65 h25 r270; Mechanical 7 "0.138in/3.5mm" at 987.5,3690.15 h25 r270
P1: Top Overlay "1" at 2576.97,2295.47 h50 r270; Top Overlay "2" at 2879.13,2306.3 h50 r270; Top Overlay "40" at 2879.13,423.43 h50 r270; Top Overlay "39" at 2566.14,428.35 h50 r270